# Altium PCB STRWL-P01-V01.PcbDoc
Units mil, origin at the board's own origin, x right, y up, seen from the top; angles counter-clockwise.
Board outline 6000 x 4000 mil, 2 copper layers (Top Layer, Bottom Layer); 109 components, 76 nets, 401 pads, 30 vias.
Unrouted connection lines stored in the file: 162.
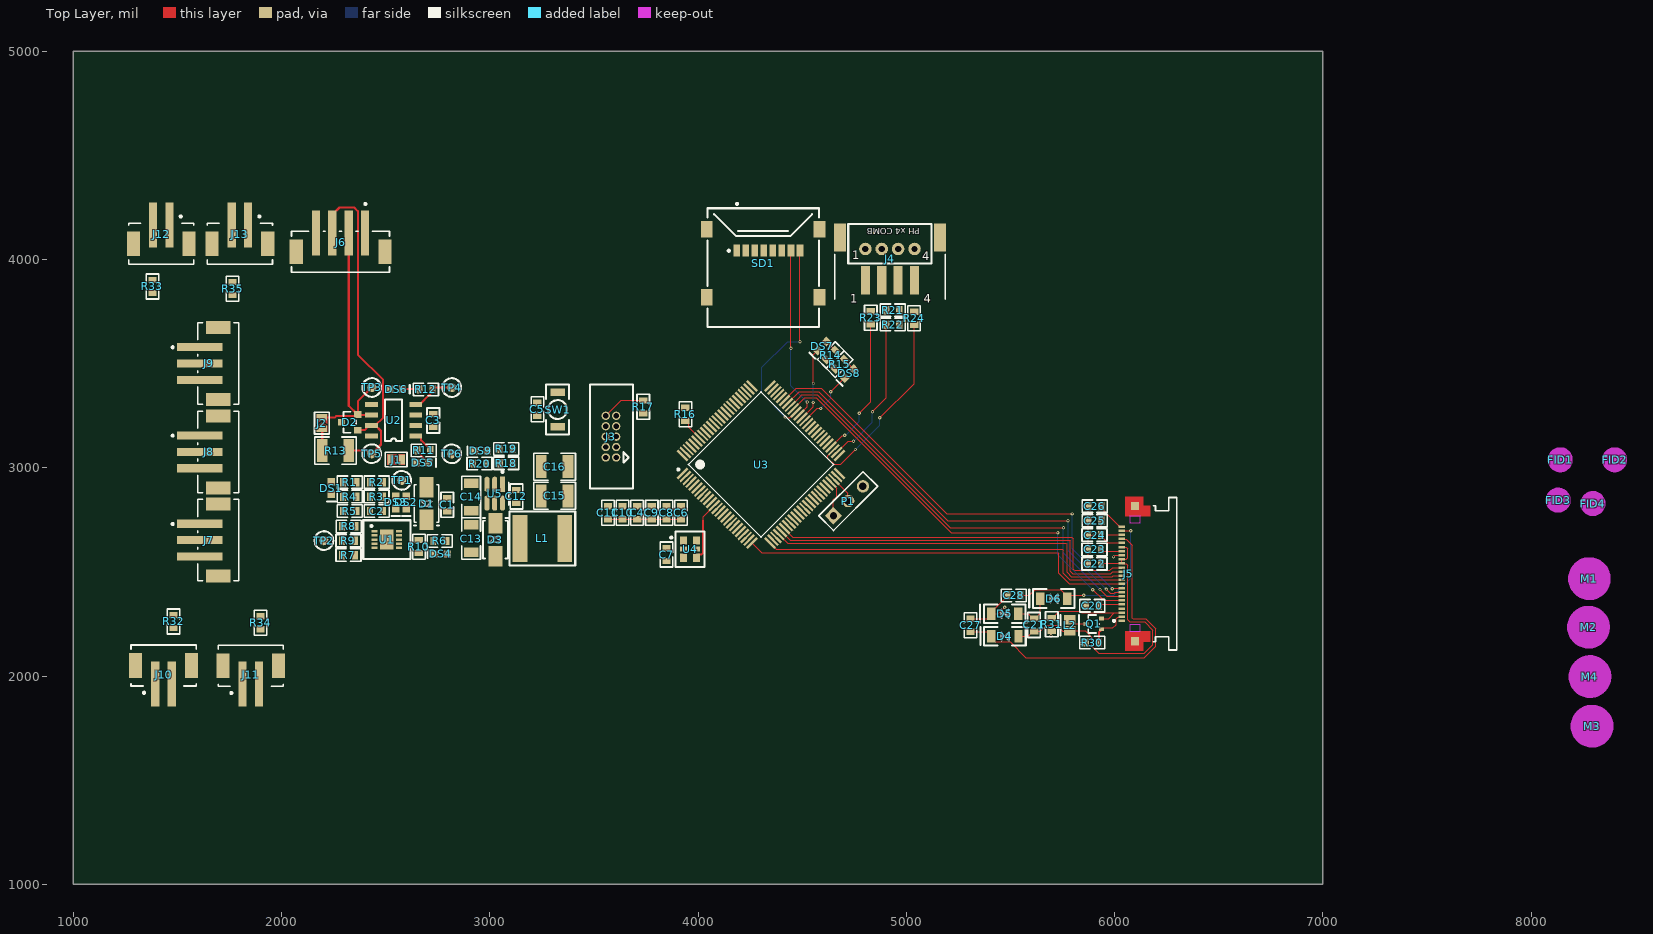
[diagram p0: Top Layer view]
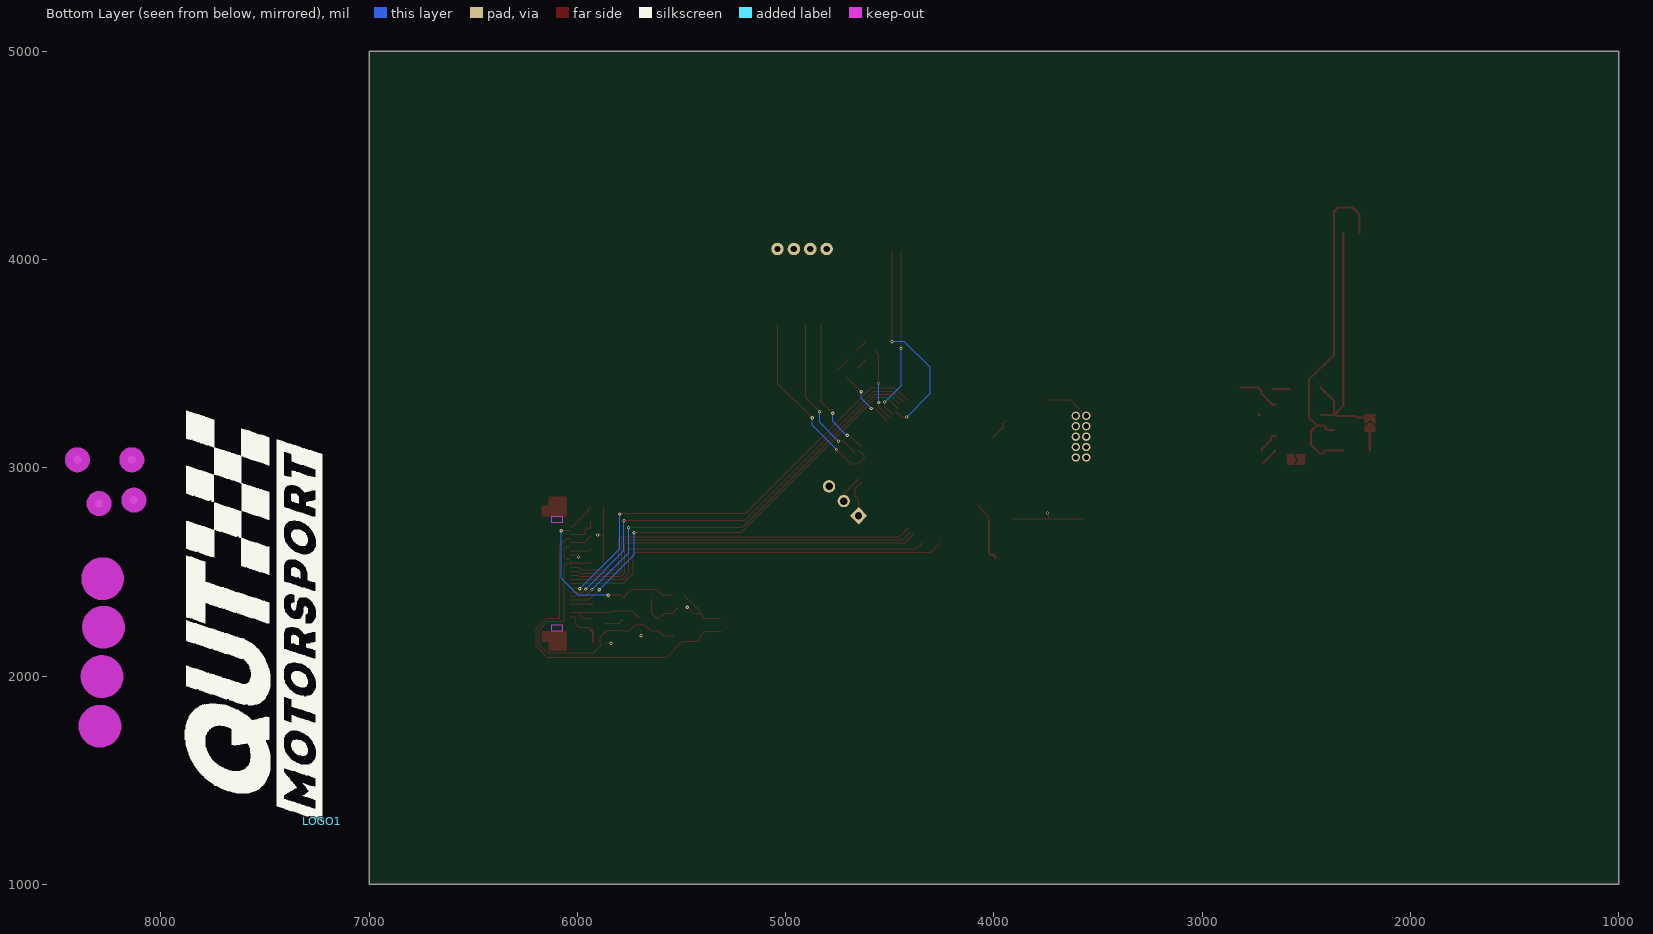
[diagram p1: Bottom Layer view, seen from below]

## Layer stack, top to bottom
Top Solder: solder mask 0.4, Solder Resist, Dk 3.5
Top Layer: signal copper 1.4
Dielectric 1: dielectric 12.6, FR-4, Dk 4.8
Bottom Layer: signal copper 1.4
Bottom Solder: solder mask 0.4, Solder Resist, Dk 3.5

## Board outline
1000,1000 7000,1000 7000,5000 1000,5000

## Design rules (kind name [scope] priority, off if disabled: settings)
Clearance [All] p1: gap=10 ignorepadtopadclearanceinfootprint=TRUE except(0: Arc-Hole Track-Hole SMDPad-Hole THPad-Hole Via-Hole Fill-Hole Poly-Hole Region-Hole Text-Hole)
PolygonConnect [All] p1: connectstyle=Relief reliefconductorwidth=10 reliefentries=4 polygonreliefangle="90 Angle" airgapwidth=10
RoutingVias [All] p1: holewidth=7.87 width=15.75 viastyle="Through Hole" minholewidth=7.87 minwidth=15.75 maxholewidth=7.87 maxwidth=15.75
SolderMaskExpansion [All] p1: expansion=4 istentingtop=FALSE
Width [All] p1: maxlimit=20 minlimit=5 preferedwidth=10
30 further rules are at their usual default settings.

## Classes and differential pairs
component class U_STRWL-S06-V00-Peripherals: J4 R21 R22 R23 R24 SD1
component class U_STRWL-S05-V00-Master-PSU3V3-300mA: C12 C13 C14 C15 C16 D3 DS9 L1 R18 R19 R20 U5
component class U_STRWL-S04-V00-Microcontroller: C4 C5 C6 C7 C8 C9 C10 C11 DS7 DS8 J3 P1 R14 R15 R16 R17 SW1 U3 U4
component class U_STRWL-S03-V00-CAN_MAIN: C3 D2 DS5 DS6 J1 J2 R11 R12 R13 TP3 TP4 TP5 TP6 U2
component class U_STRWL-S02-V00-12VProtection: C1 C2 D1 DS1 DS2 DS3 DS4 R1 R2 R3 R4 R5 R6 R7 R8 R9 R10 TP1 TP2 U1
component class STRWL-S01-V01-Master1: C20 C21 C22 C23 C24 C25 C26 C27 C28 D4 D5 D6 FID1 FID2 FID3 FID4 J5 J6 J7 J8 J9 J10 J11 J12 J13 L2 LOGO1 M1 M2 M3 M4 Q1 R30 R31 R32 R33 R34 R35

## Components (designator, comment, footprint, x,y, rotation, side; value= is the part's Value field where it differs from the comment)
C1 "4u7 50V 5%" Cap_Ceramic_0603 2795,2823 r270 top
C2 "470nF 50V 5%" Cap_Ceramic_0603 2456,2793 r180 top
C3 "100nF 50V 5% X7R 0603" Cap_Ceramic_0603 2728,3227.76 r270 top
C4 "100nF 50V 5% X7R 0603" Cap_Ceramic_0603 3707,2785.08 r90 top
C5 "100nF 50V 5% X7R 0603" Cap_Ceramic_0603 3228,3282 r90 top
C6 "100nF 50V 5% X7R 0603" Cap_Ceramic_0603 3918,2784.84 r90 top
C7 "100nF 50V 5% X7R 0603" Cap_Ceramic_0603 3848,2584 r90 top
C8 "100nF 50V 5% X7R 0603" Cap_Ceramic_0603 3848,2784.84 r90 top
C9 "100nF 50V 5% X7R 0603" Cap_Ceramic_0603 3777,2784.84 r90 top
C10 "100nF 50V 5% X7R 0603" Cap_Ceramic_0603 3637,2785.08 r90 top
C11 "4u7" Cap_Ceramic_0603 3567,2785.08 r90 top
C12 "100nF 50V 5% X7R 0603" Cap_Ceramic_0603 3127,2862.76 r270 top
C13 "22uF 35V" Cap_Ceramic_1206 2910,2660.76 r270 top
C14 "22uF 35V" Cap_Ceramic_1206 2910,2860.24 r90 top
C15 "47uF 16V 1210" Cap_Ceramic_1210 3311,2865.76 r180 top
C16 "47uF 16V 1210" Cap_Ceramic_1210 3311,3005.76 r180 top
C20 "1uF 25V 5% X7R 0603" Cap_Ceramic_0603 5892,2338 r0 top
C21 "4u7 50V 5% X7R 0603" Cap_Ceramic_0603 5613,2246 r270 top
C22 "1uF 25V 5% X7R 0603" Cap_Ceramic_0603 5903.26,2540 r0 top
C23 "1uF 25V 5% X7R 0603" Cap_Ceramic_0603 5903.31,2608.51 r0 top
C24 "1uF 25V 5% X7R 0603" Cap_Ceramic_0603 5903.31,2677.51 r0 top
C25 "1uF 25V 5% X7R 0603" Cap_Ceramic_0603 5903.69,2746.49 r0 top
C26 "1uF 25V 5% X7R 0603" Cap_Ceramic_0603 5904,2816 r0 top
C27 "1uF 25V 5% X7R 0603" Cap_Ceramic_0603 5308,2245 r270 top
C28 "1uF 25V 5% X7R 0603" Cap_Ceramic_0603 5515,2388 r0 top
D1 "1N4448WQ-7-F" SMA 2696,2829 r270 top
D2 "NUP2105L" NUP2105L 2327,3219 r90 top
D3 "B260A-13-F" SMA 3026,2655.24 r90 top
D4 "STPS0530Z" SOD123 5473,2192 r180 top
D5 "STPS0530Z" SOD123 5472,2300 r180 top
D6 "STPS0530Z" SOD123 5707.89,2372.5 r180 top
DS1 "LED Red 0603" "LED RED 0603" 2238,2903 r270 top
DS2 "LED Red 0603" "LED RED 0603" 2598,2834 r270 top
DS3 "LED Green 0603" "LED GREEN 0603" 2548,2834 r270 top
DS4 "LED Green 0603" "LED GREEN 0603" 2765,2586.76 r180 top
DS5 "LED Blue 0603" "LED BLUE 0603" 2676.76,3024.54 r0 top
DS6 "LED Blue 0603" "LED BLUE 0603" 2550.33,3378 r0 top
DS7 "LED Orange" "LED ORANGE 0603" 4594.92,3585 r225 top
DS8 "LED Orange" "LED ORANGE 0603" 4725.21,3453.21 r225 top
DS9 "LED Green 0603" "LED GREEN 0603" 2956.76,3082 r180 top
FID1 "Fiducial 1MM" "FIDUCIAL 1MM" 8139,3039 r0 top
FID2 "Fiducial 1MM" "FIDUCIAL 1MM" 8400,3039 r90 top
FID3 "Fiducial 1MM" "FIDUCIAL 1MM" 8129,2845 r90 top
FID4 "Fiducial 1MM" "FIDUCIAL 1MM" 8296,2828.78 r90 top
J1 "Jumper 2Way Solderable" Jumper_2Way_Solderable 2577.23,3040.14 r90 top
J2 "Jumper 2Way Solderable" Jumper_2Way_Solderable 2192.99,3187.93 r0 top
J3 "IDC 10P 2x5 1.27mm" "IDC 1.27MM 10P" 3581.26,3150.1 r90 top
J4 "JST PH 4x RIGHT COMB" "JST PH 4x RIGHT COMB" 4920.84,4166.06 r0 top
J5 "52437-2471" MOLX-52437-2471 6066,2492 r90 top
J6 "JST PH 4 Way VERT SMD" "JST 4P VERT SMD" 2281.91,4038.42 r180 top
J7 "JST PH 3 Way VERT SMD" "JST 3P VERT SMD" 1695.51,2653.27 r270 top
J8 "JST PH 3 Way VERT SMD" "JST 3P VERT SMD" 1695.51,3076.79 r270 top
J9 "JST PH 3 Way VERT SMD" "JST 3P VERT SMD" 1695.51,3501.27 r270 top
J10 "JSP PH 2 Way VERT SMD" "JST 2P VERT SMD" 1433,2002 r180 top
J11 "JSP PH 2 Way VERT SMD" "JST 2P VERT SMD" 1852,2001 r180 top
J12 "JSP PH 2 Way VERT SMD" "JST 2P VERT SMD" 1422,4126.02 r0 top
J13 "JSP PH 2 Way VERT SMD" "JST 2P VERT SMD" 1799.51,4126.02 r0 top
L1 "74404064221" Inductor_6x6mm 3250,2661.24 r0 top
L2 "LQM21FN100M70L" Murata_LQM21FN_70_IPC_C 5784,2244 r90 top
LOGO1 "50mm Wide QUTMS Logo" "QUTMS LOGO 50MM" 7224.16,1304 r90 bottom
M1 "Hole M3 Tight Unplated" "M3.2 UNPLATED" 8279,2468.1 r0 top
M2 "Hole M3 Tight Unplated" "M3.2 UNPLATED" 8275,2235.3 r0 top
M3 "Hole M3 Tight Unplated" "M3.2 UNPLATED" 8292,1760 r0 top
M4 "Hole M3 Tight Unplated" "M3.2 UNPLATED" 8282,1998 r0 top
P1 "Header 3" HDR1X3 4649.72,2770 r45 top
Q1 "MOSFET N-CH 30V 4A SOT323" Diodes_SOT323_0 5900,2250.61 r90 top
R1 "4k7 5% 0603" Res_ThinFilm_0603 2327,2931 r0 top
R2 "4k7 5% 0603" Res_ThinFilm_0603 2456,2931 r180 top
R3 "4k7 5% 0603" Res_ThinFilm_0603 2455.94,2862 r180 top
R4 "2M2 1%" Res_ThinFilm_0603 2327,2862 r0 top
R5 "2M2 1%" Res_ThinFilm_0603 2327,2793 r0 top
R6 "4k7 5% 0603" Res_ThinFilm_0603 2760,2649 r180 top
R7 "150k 5% 0603" Res_ThinFilm_0603 2321,2581 r0 top
R8 "390k 5%" Res_ThinFilm_0603 2322,2719 r0 top
R9 "240k 5%" Res_ThinFilm_0603 2321,2650 r0 top
R10 "1k 5% 0603" Res_ThinFilm_0603 2659,2622 r270 top
R11 "330R" Res_ThinFilm_0603 2682.24,3084 r180 top
R12 "330R" Res_ThinFilm_0603 2693.24,3376.81 r180 top
R13 "120R 1% 1210" Res_ThinFilm_1210 2259,3083 r180 top
R14 "330R" Res_ThinFilm_0603 4636.92,3542 r225 top
R15 "330R" Res_ThinFilm_0603 4680,3498 r225 top
R16 "10k 1% 0603" Res_ThinFilm_0603 3938.44,3257.15 r90 top
R17 "4k7" Res_ThinFilm_0603 3736,3292.87 r270 top
R18 "64k9 1%" Res_ThinFilm_0603 3078.24,3022 r0 top
R19 "1k" Res_ThinFilm_0603 3077.87,3091 r0 top
R20 "19k6 1%" Res_ThinFilm_0603 2950.24,3021 r0 top
R21 "10k 5% 0603" Res_ThinFilm_0603 4934.5,3757 r0 top
R22 "15k 5% 0603" Res_ThinFilm_0603 4934.5,3688 r180 top
R23 "22R" Res_ThinFilm_0603 4829,3720.76 r270 top
R24 "22R" Res_ThinFilm_0603 5037,3718.76 r270 top
R30 "10k 1% 0603" Res_ThinFilm_0603 5892.57,2161.22 r180 top
R31 "0R47 5% 0603" Res_ThinFilm_0603 5698,2248.61 r90 top
R32 "10k 5% 0603" Res_ThinFilm_0603 1481,2262.76 r270 top
R33 "10k 5% 0603" Res_ThinFilm_0603 1380,3871 r90 top
R34 "10k 5% 0603" Res_ThinFilm_0603 1899,2256 r90 top
R35 "10k 5% 0603" Res_ThinFilm_0603 1764.51,3860.76 r270 top
SD1 "47219-2001" 47219-2001 4312,3982.75 r0 top
SW1 "B3U-1000P" "BTN B3U-1000P" 3325.26,3280.1 r90 top
TP1 "TestPoint" TestPointSMD 2577,2940 r180 top
TP2 "TestPoint" TestPointSMD 2203,2651 r0 top
TP3 "TestPoint_SMD" TestPointSMD 2433,3386.07 r0 top
TP4 "TestPoint_SMD" TestPointSMD 2817,3385.83 r0 top
TP5 "TestPoint_SMD" TestPointSMD 2433,3068.14 r0 top
TP6 "TestPoint_SMD" TestPointSMD 2817,3067.67 r0 top
U1 "MAX17612A" MAX17612A 2505,2656 r0 top
U2 "SN65HVD233" SN65HVD233DR 2538,3229 r180 top
U3 "STM32F207VGT7" STM-LQFP100_N 4301.74,3016.1 r45 top
U4 "DSC1101CI5-020.0000T" VDFN6_3P2X2P5_MCH 3961,2610 r0 top
U5 "LMR14010ADDCR" Texas_Instruments_DDC0006A_IPC_A 3023.24,2876 r270 top

## Footprints (in the part's own frame and the unit in brackets; to place one, negate y for a bottom-side part, rotate by r counter-clockwise, add the part's x,y. Pads: shape width x height; smd on the part's side, far side on the other; paste and mask are expansions set on the pad)
47219-2001 [mm]
  rect 0.8x1.5 smd: 1(-3.205,1.55) 2(-2.105,1.55) 3(-1.005,1.55) 4(0.095,1.55) 5(1.195,1.55) 6(2.295,1.55) 7(3.395,1.55) 8(4.495,1.55)
  rect 1.45x2 smd: 9(6.875,4.15) 10(6.875,-4.15) 11(-6.875,-4.15) 12(-6.875,4.15)
  silkscreen extent -6.8,-7.8 6.8,7.36, body extent -7.3,-7.79 7.3,6.71, height 1.91
"BTN B3U-1000P" [mil] "OMRON B3U-1000P"
  rect 35x70 smd: 1(-82.68,0) 2(82.68,0)
  silkscreen extent -120,-55 120,55, body extent -79,-49 79,49, height 63
Cap_Ceramic_0603 [mil]
  rect 30x40 smd: 1(-31.24,0) 2(31.24,0)
  silkscreen extent -60,-30 60,30, body extent -31,-16 32,16, height 33
Cap_Ceramic_1206 [mil]
  rect 47x71 smd: 1(-66.08,0) 2(66.08,0)
  silkscreen extent -100,-45 100,45, body extent -63,-31 63,32, height 53
Cap_Ceramic_1210 [mm]
  rect 1.3x2.8 smd: 1(-1.625,0) 2(1.625,0)
  silkscreen extent -2.54,-1.65 2.54,1.65, body extent -1.6,-1.25 1.6,1.25, height 1.35
Diodes_SOT323_0 [mm]
  rect 0.47x0.6 smd paste+0 mask+0: 1(0,0.95) 2(-0.65,-0.95) 3(0.65,-0.95)
  silkscreen extent -1.1,-0.67 1.1,0.67, body extent -1.35,-1.2 1.35,1.2, height 0.25
"FIDUCIAL 1MM" [mm]
  round 1 smd mask+1: 1(0,0)
  round 1 smd far side mask+1: 1(0,0)
  Keep-Out Layer circle w1.524: c0,0 r0.762
HDR1X3 [mm] "Connector; Header; 3 Position"
  rect 1.5x1.5 hole 0.9: 1(0,0)
  round 1.5 hole 0.9: 2(2.54,0) 3(5.08,0)
  silkscreen extent -1.27,-1.27 6.35,1.27
"IDC 1.27MM 10P" [mil]
  round 40 hole 25: 1(-100,-25) 2(-100,25) 3(-50,-25) 4(-50,25) 5(0,-25) 6(0,25) 7(50,-25) 8(50,25) 9(100,-25) 10(100,25)
  silkscreen extent -250,-105 250,100, body extent -249,-104 249,100, height 214
Inductor_6x6mm [mm]
  rect 1.8x5.7 smd: 1(-2.667,0) 2(2.794,0)
  silkscreen extent -3.94,-3.3 4.06,3.3, body extent -3,-3 3,3, height 4.56
"JST 2P VERT SMD" [mm]
  rect 1x5.5 smd paste+0 mask+0: 1(1,1) 2(-1,1)
  rect 1.6x3 smd paste+0 mask+0: 3(3.4,-1.25) 4(-3.4,-1.25)
  silkscreen extent -3.98,-3.75 3.98,2.2, body extent -4.3,-3.85 4.3,3.85, height 0.25
"JST 3P VERT SMD" [mm]
  rect 1x5.5 smd paste+0 mask+0: 1(-2,-2.25) 2(0,-2.25) 3(2,-2.25)
  rect 1.6x3 smd paste+0 mask+0: 4(-4.4,0) 5(4.4,0)
  silkscreen extent -4.97,-5.67 4.97,2.5, body extent -5.3,-5.1 5.3,2.6, height 0.25
"JST 4P VERT SMD" [mm]
  rect 1x5.5 smd paste+0 mask+0: 1(-3.025,-2.25) 2(-1.025,-2.25) 3(0.975,-2.25) 4(2.975,-2.25)
  rect 1.6x3 smd paste+0 mask+0: 5(-5.425,0) 6(5.375,0)
  silkscreen extent -6,-5.95 5.95,2.5, body extent -6.32,-5.1 6.27,2.6, height 0.25
"JST PH 4x RIGHT COMB" [mm]
  rect 1.1x3.5 smd: 1(-3,-6.75) 2(-1,-6.75) 3(1,-6.75) 4(3,-6.75)
  round 1.524 hole 0.762: 1(-3,-2.921) 2(-1,-2.921) 3(1,-2.921) 4(3,-2.921)
  rect 1.5x3.4 smd: M(-6.1,-1.5) M(6.1,-1.5)
  silkscreen extent -6.73,-9.02 6.73,0.13, body extent -6.07,-8.2 6.07,0.06, height 5.89
Jumper_2Way_Solderable [mil]
  rect 50x30 smd: 1(0,55) 2(0,0)
  Top Layer region: -25,25 0,40 25,25 25,70 -25,70
  Top Layer region: -25,15 0,30 25,15 25,-15 0,-15 -25,-15
  silkscreen extent -35,-25 35,80
"LED BLUE 0603" [mil]
  rect 35x35 smd: 1(-30,0) 2(30,0)
  silkscreen extent 65,-20 65,20, body extent -40,-20 40,20, height 30
"LED GREEN 0603" [mil]
  rect 35x35 smd: 1(-30,0) 2(30,0)
  silkscreen extent 65,-20 65,20, body extent -40,-20 40,20, height 30
"LED ORANGE 0603" [mil]
  rect 35x35 smd: 1(-30,0) 2(30,0)
  silkscreen extent 65,-20 65,20, body extent -40,-20 40,20, height 30
"LED RED 0603" [mil]
  rect 35x35 smd: 1(-30,0) 2(30,0)
  silkscreen extent 65,-20 65,20, body extent -40,-20 40,20, height 30
"M3.2 UNPLATED" [mm]
  round 0 hole 3.2 unplated mask+2.6: 1(0,0)
  Keep-Out Layer circle w2.667: c0,0 r1.27
MAX17612A [mm]
  rect 0.75x0.3 smd: 1(-1.5,1) 2(-1.5,0.5) 3(-1.5,0) 4(-1.5,-0.5) 5(-1.5,-1) 6(1.5,-1) 7(1.5,-0.5) 8(1.5,0) 9(1.5,0.5) 10(1.5,1)
  rect 1.6x2.4 smd: 11(0,0)
  silkscreen extent -2.87,-2.4 2.87,2.35, body extent -1.55,-1.5 1.55,1.5, height 0.8
MOLX-52437-2471 [mm] "FPC Connector, 24-Leads, Right Angle, Pitch 0.5 mm, SMT"
  rect 0.3x0.8 smd: 1(-5.75,0.8) 2(-5.25,0.8) 3(-4.75,0.8) 4(-4.25,0.8) 5(-3.75,0.8) 6(-3.25,0.8) 7(-2.75,0.8) 8(-2.25,0.8) 9(-1.75,0.8) 10(-1.25,0.8) 11(-0.75,0.8) 12(-0.25,0.8) 13(0.25,0.8) 14(0.75,0.8) 15(1.25,0.8) 16(1.75,0.8) 17(2.25,0.8) 18(2.75,0.8) 19(3.25,0.8) 20(3.75,0.8) 21(4.25,0.8) 22(4.75,0.8) 23(5.25,0.8) 24(5.75,0.8)
  rect 1x1 smd: MP1(-8.25,-0.8) MP2(8.25,-0.8)
  Top Layer region: 7,0.4 9.4,0.4 9.4,-1.8 8.3,-1.8 8.3,-2.65 7,-2.65
  Top Layer region: -7,0.4 -9.4,0.4 -9.4,-1.8 -8.3,-1.8 -8.3,-2.65 -7,-2.65
  Keep-Out Layer region: 6.2,-1.45 7,-1.45 7,-0.15 6.2,-0.15
  Keep-Out Layer region: -6.2,-0.15 -7,-0.15 -7,-1.45 -6.2,-1.45
  silkscreen extent -9.3,-5.9 9.3,1.87, body extent -9.3,-5.9 9.3,0.9, height 2.05
Murata_LQM21FN_70_IPC_C [mil]
  rect 45.45x53.39 smd paste+0 mask+0: 1(-26.61,0) 2(26.61,0)
  silkscreen extent -49,-44 49,44, body extent -53,-32 53,32, height 10
NUP2105L [mm]
  rect 0.8x0.9 smd: 1(-0.95,-1) 2(0.95,-1) 3(0,1)
  silkscreen extent -1.27,-0.76 1.27,0.76, body extent -1.45,-1.22 1.45,1.18, height 1
"QUTMS LOGO 50MM" [mil]
  silkscreen extent 0,0 1970,660
Res_ThinFilm_0603 [mil]
  rect 30x40 smd: 1(-31.24,0) 2(31.24,0)
  silkscreen extent -60,-30 60,30, body extent -31,-16 32,16, height 18
Res_ThinFilm_1210 [mm]
  rect 1.3x2.8 smd: 1(-1.625,0) 2(1.625,0)
  silkscreen extent -2.54,-1.65 2.54,1.65, body extent -1.6,-1.25 1.6,1.25, height 0.6
SMA [mm]
  rect 2.5x1.7 smd: A(-2,0) K(2,0)
  silkscreen extent -2.3,-1.52 2.67,1.52, body extent -2.52,-1.46 2.52,1.46, height 2.4
SN65HVD233DR [mm]
  rect 1.55x0.6 smd: 1(-2.7,1.903) 2(-2.7,0.633) 3(-2.7,-0.637) 4(-2.7,-1.907) 5(2.7,-1.907) 6(2.7,-0.637) 7(2.7,0.633) 8(2.7,1.903)
  silkscreen extent -1.04,-2.54 1.04,2.54, body extent -3.01,-2.45 3.01,2.45, height 1.63
SOD123 [mil]
  rect 40x60 smd: A(-65,0) K(65,0)
  silkscreen extent -100,-45 118,45, body extent -74,-33 74,33, height 47
STM-LQFP100_N [mm] "Thin QFP, 100-Leads, Body 14x14mm, Pitch 0.5mm, IPC Medium Density"
  rect 1.8x0.3 smd: 1(-7.55,6) 2(-7.55,5.5) 3(-7.55,5) 4(-7.55,4.5) 5(-7.55,4) 6(-7.55,3.5) 7(-7.55,3) 8(-7.55,2.5) 9(-7.55,2) 10(-7.55,1.5) 11(-7.55,1) 12(-7.55,0.5) 13(-7.55,0) 14(-7.55,-0.5) 15(-7.55,-1) 16(-7.55,-1.5) 17(-7.55,-2) 18(-7.55,-2.5) 19(-7.55,-3) 20(-7.55,-3.5) 21(-7.55,-4) 22(-7.55,-4.5) 23(-7.55,-5) 24(-7.55,-5.5) 25(-7.55,-6) 51(7.55,-6) 52(7.55,-5.5) 53(7.55,-5) 54(7.55,-4.5) 55(7.55,-4) 56(7.55,-3.5) 57(7.55,-3) 58(7.55,-2.5) 59(7.55,-2) 60(7.55,-1.5) 61(7.55,-1) 62(7.55,-0.5) 63(7.55,0) 64(7.55,0.5) 65(7.55,1) 66(7.55,1.5) 67(7.55,2) 68(7.55,2.5) 69(7.55,3) 70(7.55,3.5) 71(7.55,4) 72(7.55,4.5) 73(7.55,5) 74(7.55,5.5) 75(7.55,6)
  rect 0.3x1.8 smd: 26(-6,-7.55) 27(-5.5,-7.55) 28(-5,-7.55) 29(-4.5,-7.55) 30(-4,-7.55) 31(-3.5,-7.55) 32(-3,-7.55) 33(-2.5,-7.55) 34(-2,-7.55) 35(-1.5,-7.55) 36(-1,-7.55) 37(-0.5,-7.55) 38(0,-7.55) 39(0.5,-7.55) 40(1,-7.55) 41(1.5,-7.55) 42(2,-7.55) 43(2.5,-7.55) 44(3,-7.55) 45(3.5,-7.55) 46(4,-7.55) 47(4.5,-7.55) 48(5,-7.55) 49(5.5,-7.55) 50(6,-7.55) 76(6,7.55) 77(5.5,7.55) 78(5,7.55) 79(4.5,7.55) 80(4,7.55) 81(3.5,7.55) 82(3,7.55) 83(2.5,7.55) 84(2,7.55) 85(1.5,7.55) 86(1,7.55) 87(0.5,7.55) 88(0,7.55) 89(-0.5,7.55) 90(-1,7.55) 91(-1.5,7.55) 92(-2,7.55) 93(-2.5,7.55) 94(-3,7.55) 95(-3.5,7.55) 96(-4,7.55) 97(-4.5,7.55) 98(-5,7.55) 99(-5.5,7.55) 100(-6,7.55)
  silkscreen extent -7.67,-6.25 6.25,6.82, body extent -7,-7 7,7, height 1.6
TestPointSMD [mil]
  round 45 smd: 1(0,0)
  silkscreen extent -45,-45 45,45
Texas_Instruments_DDC0006A_IPC_A [mm]
  rect 1.854x0.612 smd paste+0 mask+0: 1(-1.15,0.95)
  rrect100% 1.854x0.612 smd paste+0 mask+0: 2(-1.15,0) 3(-1.15,-0.95) 4(1.15,-0.95) 5(1.15,0) 6(1.15,0.95)
  silkscreen extent -2.8,-1.7 1.4,1.7, body extent -2.58,-1.95 2.58,1.95, height 0.25
VDFN6_3P2X2P5_MCH [mm]
  rect 0.85x1 smd paste-0.425 mask+0: 1(-0.8,1.05) 3(-0.8,-1.05) 4(0.8,-1.05) 6(0.8,1.05)
  rect 0.85x0.6 smd paste+0 mask+0: 2(-0.8,0) 5(0.8,0)
  silkscreen extent -2.41,-2.16 1.78,2.16, body extent -1.25,-1.6 1.25,1.6, height 0.65

## Part data
C1 C11: library part "4u7 50V 5% X7R 0603", "Capacitor, Ceramic, SMD, 4u7, 50V, 5%, X7R, 0603"
C2: library part "470nF 50V 5% X7R 0603", "Capacitor, Ceramic, SMD, 470nF, 50V, 5%, X7R, 0603"
C3 C4 C5 C6 C7 C8 C9 C10 C12: "Capacitor, Ceramic, SMD, 100nF, 50V, 5%, X7R, 0603"
C13 C14: library part "22uF 35V 20% X5R 1206", "22µF ±20% 35V Ceramic Capacitor X5R 1206 (3216 Metric)", ComponentLink1Description=Digikey, ComponentLink1URL=https://www.digikey.com.au/product-detail/en/tdk-corporation/C3216X5R1V226M160AC/445-8045-1-ND/2792165, ComponentLink2Description=Datasheet, ComponentLink2URL=https://product.tdk.com/info/en/catalog/datasheets/mlcc_commercial_general_en.pdf
C15 C16: library part "47uF 16V 10% X7R 1210", "Capacitor, Ceramic, SMD, 47uF, 16V, 5%, X7R, 1210"
C20 C22 C23 C24 C25 C26 C27 C28: "Capacitor, Ceramic, SMD, 1uF, 25V, 5%, X7R, 0603"
C21: "Capacitor, Ceramic, SMD, 4u7, 50V, 5%, X7R, 0603"
D1: "Diode, SMD, 75V, 5%, 250mA, SOD123", Average Rectified Current=150mA, Forward Voltage=1V, Manufacturer="ON Semiconductor / Fairchild", Manufacturer Part Number=1N914BWS, Max Forward Surge Current (Ifsm)=4A, Max Operating Temperature=150°C, Max Repetitive Reverse Voltage (Vrrm)=75V, Max Reverse Leakage Current=5uA, Min Operating Temperature=-55°C, Package Quantity=1, Power Dissipation=200mW, Category="Rectifier Diodes", Contact Plating=Tin,Matte, Element Configuration=Single, Forward Current=150mA, Height=1mm, Lead Free="Lead Free", Length=1.8mm, Max Reverse Voltage (DC)=75V, Mount="Surface Mount", Number of Pins=2, Packaging="Tape and Reel", Peak Reverse Current=5uA, Radiation Hardening=No, REACH SVHC="No SVHC", Recovery Time=4ns, Reverse Recovery Time=4ns, Reverse Voltage=75V, Weight=0.0276g, Width=1.35mm
D3: "Diode, Schottky Barrier Rectifier, 60 V, 2 A, B260A-13-F"
D4 D5 D6: "Diode, Schottky Barrier Rectifier, 30 V, 0.5 A, STPS0530Z"
DS5 DS6: library part "LED BLUE 0603"
DS7 DS8: library part "LED ORANGE 0603"
J1 J2: library part "Jumper 2Way Side Solderable", "Jumper 2Way Side Solderable"
J5: "0.5 mm Pitch Easy-On(TM) Type FPC Connector, Right Angle, ZIF, SMT, Bottom Contact, 24 Circuits, -40 to 85 degC, ELV and RoHS Compliant, Tape and Reel", Current (Max per Contact)=0.5A, Manufacturer=Molex, Voltage (Max)=50V, Circuits (Loaded)=24, ComponentLink1Description="Manufacturer URL", ComponentLink1URL=http://www.molex.com/molex/index.jsp, ComponentLink2Description=Datasheet, ComponentLink2URL=http://www.molex.com/webdocs/datasheets/pdf/en-us/0524372471_FFC_FPC_CONNECTORS.pdf, ComponentLink3Description="Package Specification", ComponentLink3URL=http://www.molex.com/pdm_docs/sd/524372471_sd.pdf, Contact Position=Bottom, Durability (mating cycles max)=20, Entry Angle="90degrees Angle", Material - Metal="Phosphor Bronze", Material - Plating Mating=Gold, Material - Plating Termination=Gold, Mounting Technology="Surface Mount", Number of Rows=1, Orientation="Right Angle", PackageDescription="24-Lead FPC Connector, Pitch 0.5 mm", PackageReference=52437-2471, PackageVersion="Rev. E, 07/2013", Packing="Tape and Reel", PartNumber=52437-2471, PCB Locator=No, PCB Retention=None, Pitch - Mating Interface=0.50mm, Polarized to PCB=Yes, RoHS=TRUE, Stackable=No
J10 J11 J12 J13: color=White, current_rating="2 A", Digikey Part Number=455-1734-1-ND, flammability_rating="UL 94 V-0", housing_color=Natural, insulation_resistance="1 GO", Manufacturer=JST, Package=CONN_SMT_7MM95_5MM0, Temperature="-25°C to +85°C", Temperature Range High=+85°C, Temperature Range Low=-25°C, voltage_rating_ac="100 V", Category 75Fab8F04590Ae3D="Connectors and Adapters", Category 0836C53C3D42D3F1=Connectors, Category A3C16Ecb93907806=Uncategorized, Category Bda670Ac885E6661=Uncategorized, Category Dab617Bcef8C0171="PC Board", Category E42C2926D3763Feb="Wire to Board", Category E7012A0Bd22E3Cc6="Headers & Receptacles", Category Fcf631Fcc9332731=Uncategorized, ComponentLink1Description=Upverter, ComponentLink1URL=https://upverter.com/upn/revision/aa2260f5f3c02952/, ComponentLink2Description=Datasheet, ComponentLink2URL=https://upverter.com/datasheet/05f4473ffc638d76a3bb68900fd4324175be47ba.pdf, contact_material=Brass, contact_plating=Tin, Digikey Description="CONN 2 Positions Header, Shrouded Connector 0.079\" (2.00mm) Surface Mount Tin", gender=Female, helpURL=https://upverter.com/upn/revision/aa2260f5f3c02952/, housing_material=Nylon, Lead Free=yes, Mounting Type="surface mount", number_of_contacts=2, number_of_positions=2, number_of_rows=1, Num Pins=2, pin_pitch="2 mm", Price=0.401172514632, RoHS=TRUE, size_height="6.6 mm", size_length="7.95 mm", size_width="5 mm", Supplier 1=Digi-Key, Supplier 2=Mouser, Supplier Part Number 1=455-1734-1-ND
L1: "FIXED IND 220UH 660MA 850 MOHM", ComponentLink1Description=Digikey, ComponentLink1URL=https://www.digikey.com.au/product-detail/en/w%C3%BCrth-elektronik/74404064221/732-7261-1-ND/5353241, ComponentLink2Description="LCSC A", ComponentLink2URL=https://lcsc.com/product-detail/Power-Inductors_Sunlord-SWPA6045S221MT_C91047.html, ComponentLink3Description="LCSC B", ComponentLink3URL=https://lcsc.com/product-detail/Power-Inductors_SXN-Shun-Xiang-Nuo-Elec-SMNR6045-221MT_C467145.html
LOGO1: library part "QUTMS Logo 50mm"
M1 M2 M3 M4: "M3.2 Hole, No Plating"
P1: "Header, 3-Pin", LatestRevisionDate=17-Jul-2002, LatestRevisionNote="Re-released for DXP Platform.", Publisher="Altium Limited"
Q1: library part DMN3065LW-13, "N-Channel 30V 4A (Ta) 770mW (Ta) Surface Mount SOT-323"
R1 R2 R3 R6: "Resistor, SMD, 4k7, 0.1W, 5%, 0603"
R4 R5: library part "2M2 1% 0603", "Resistor, SMD, 2M2, 0.125W, 1%, 0603"
R7: library part "150k 5%, 0603", "Resistor, SMD, 150k, 0.1W, 5%, 0603"
R8: library part "390k 5% 0603", "Resistor, SMD, 390k, 0.1W, 5%, 0603"
R9: library part "240k 5% 0603", "Resistor, SMD, 240k, 0.1W, 5%, 0603"
R10: "Resistor, SMD, 1k, 0.1W, 5%, 0603"
R11 R12 R14 R15: library part "330R 5% 0603", "Resistor, SMD, 330R, 0.1W, 5%, 0603"
R13: "Resistor, SMD, 120R, 0.25W, 1%, 1210"
R16: library part "20k 1% 0603", "Resistor, SMD, 20k, 0.1W, 5%, 0603"
R17: library part "4k7 5% 0603", "Resistor, SMD, 4k7, 0.1W, 5%, 0603"
R18: library part "64k9 1% 0603", "Resistor, SMD, 64k9, 0.1W, 5%, 0603"
R19: library part "1k 5% 0603", "Resistor, SMD, 1k, 0.1W, 5%, 0603"
R20: library part "19k6 1% 0603", "Resistor, SMD, 19k6, 0.1W, 5%, 0603"
R21 R32 R33 R34 R35: "Resistor, SMD, 10k, 0.1W, 5%, 0603"
R22: "Resistor, SMD, 15k, 0.1W, 5%, 0603"
R23 R24: library part "22R 1% 0603", "Resistor, SMD, 22R, 0.1W, 1%, 0603"
R30: "Resistor, SMD, 10k, 0.1W, 1%, 0603"
R31: library part "0R47 5% 0603_1", "Resistor, SMD, 0R, 0.1W, 5%, 0603"
SD1: "MicroSD Card Connector, Hinge Type, -40 to 85 degC, 8-Pin SMD, RoHS, Tape and Reel"
SW1: library part "BTN B3U-1000P", "Omron B3U-1000P Ultra Miniture Switch", ComponentLink1Description=LCSC, ComponentLink1URL=https://lcsc.com/product-detail/Tactile-Switches_BRIGHT-TSA063G50-250_C294565.html
U1: "4.5V to 60V, 250mA Current-Limiter with OV, UV, and Reverse Protection", ComponentLink1Description=Datasheet, ComponentLink1URL=https://datasheets.maximintegrated.com/en/ds/MAX17612A-MAX17612C.pdf
U3: library part STM32F207VGT7-Custom, "ARM Cortex-M3 32-bit MCU, 1024 KB Flash, 128 KB Internal RAM, 82 I/Os, 100-pin LQFP, -40 to 105 degC, Tray", I/Os (High Current)=82, Operating Frequency(F) (Processor speed) (MHz)=120, Supply Voltage(Vcc) min (V)=1.8, ComponentLink1Description="Manufacturer URL", ComponentLink1URL=http://www.st.com/web/en/home.html, ComponentLink2Description=Datasheet, ComponentLink2URL=http://www.st.com/st-web-ui/static/active/en/resource/technical/document/datasheet/CD00237391.pdf, ComponentLink3Description="Package Specification", ComponentLink3URL=http://www.st.com/st-web-ui/static/active/en/resource/technical/document/data_brief/DM00071938.pdf, Core="ARM Cortex-M3", D/A Converter="2x12-bit (2 Channel)", DatasheetVersion="Rev. 9", FLASH Size (Prog) (kB)=1024, Internal RAM Size (kB)=128, Mounting Technology="Surface Mount", PackageDescription="100-Pin Low Profile Quad Flat Package, 14 x 14 mm Body, 0.5 mm Pitch", PackageReference=LQFP100, PackageVersion="Rev. 1, 06/2013", Packing=Tray, PartNumber=STM32F207VGT7
U4: "No Description Available", Built_By=EMA_Jessica, Copyright="Copyright (C) 2018 Accelerated Designs. All rights reserved", Manufacturer_Part_Number=DSC1101CI5-020.0000T, RefDes=RefDes, SourceLibrary=Microchip_2019-08-23_23, Type=DEV, Vendor=Microchip
D2: ComponentLink1Description=Datasheet, ComponentLink1URL=https://www.onsemi.cn/PowerSolutions/document/NUP2105L-D.PDF, ComponentLink2Description=LCSC, ComponentLink2URL=https://lcsc.com/product-detail/TVS_ON-Semiconductor-NUP2105LT1G_C14486.html, ComponentLink3Description=Digikey, ComponentLink3URL=https://www.digikey.com.au/product-detail/en/on-semiconductor/SZNUP2105LT1G/SZNUP2105LT1GOSCT-ND/3487669
U2: ComponentLink1Description=LCSC, ComponentLink1URL=https://lcsc.com/product-detail/CAN-ICs_Texas-Instruments_SN65HVD233DRG4_Texas-Instruments-Texas-Instruments-SN65HVD233DRG4_C61643.html, ComponentLink2Description=Digikey, ComponentLink2URL=https://www.digikey.com.au/product-detail/en/texas-instruments/SN65HVD233DR/296-35967-1-ND/4134960, ComponentLink3Description=Datasheet, ComponentLink3URL=https://www.ti.com/lit/ds/symlink/sn65hvd233.pdf?ts=1588560888178, ComponentLink4Description="Ti Product Page", ComponentLink4URL=https://www.ti.com/product/SN65HVD233

## Via types
v1: diameter 15.75, hole 7.87, Top Layer to Bottom Layer, 30 vias

## Nets (pads, with @x,y where several pads share a name; then routed paths per layer and width w, separated by ;. In a path a pad name is that pad's centre, name@x,y a point inside that pad or via, vN(x,y) a via of type N, cw(c..) or ccw(c..) an arc to the next point about the centre after c; other vN are vias at no path point)
3V3: C3.1 C4.2 C6.2 C7.2 C8.2 C9.2 C10.2 C11.2 C15.2 C16.2 C21.2 C22.2 D4.A J1.1 J3.1 J5.15 J5.16 J5.19 J7.3 J8.3 J9.3 L1.2 L2.1 R14.2 R15.2 R17.2 R18.2 R19.2 R32.1 R33.1 R34.2 R35.2 SD1.4 U2.3 U3.6 U3.11 U3.19 U3.22 U3.28 U3.50 U3.75 U3.100 U4.1 U4.6 | length 1569.1
  Top Layer w5: R14.2 4614.83,3518.99 R15.2 ; D4.A 5585.24,2192 5608,2214.76 C21.2 5642.71,2214.76 5672.82,2244.88 5723.18,2244.88 5736.49,2231.56 5736.49,2228.08 5749.8,2214.76 5781.38,2214.76 L2.1 5857.85,2217.39 5888.84,2186.4 5888.84,2143.52 5922.94,2109.41 6142.04,2109.41 6182.83,2150.2 6182.83,2221.58 6144.01,2260.4 6072.96,2260.4 6062.75,2270.61 6062.75,2532.6 6055.43,2539.92 6035.78,2539.92 J5.15 ; C22.2 5935.7,2541.2 J5.15 ; J5.19 6035.78,2618.66 6055.43,2618.66 6062.75,2611.34 6062.75,2569.49 6055.43,2562.17 6035.78,2562.17 J5.16 J5.15
  Top Layer w10: C3.1@2723.07,3254.07 C3.1
12V: C2.2 J6.4 R1.2 R2.2 R3.2 R4.2 R5.2 U1.1
12VP: C1.2 C13.1 C14.1 D1.K R6.2 TP1.1 U1.10 U5.4 U5.5
B1: J10.2 R32.2 U3.84
B2: J12.2 R33.2 U3.85
B3: J11.2 R34.1 U3.86
B4: J13.2 R35.1 U3.87
BOOT: R16.1 U3.94 | length 114.9
  Top Layer w5: R16.1 3943.44,3225.92 3955.94,3213.42 3955.94,3194.87 U3.94
"BUS SEL": J5.8 U3.69 | length 2116.9
  Top Layer w5: U3.69 4485.16,3366.56 4578.94,3366.56 5199.13,2746.37 v1(5775.95,2746.37) ; v1(5960,2418) 5979.28,2398.72 5998.11,2398.72 6002.8,2403.41 J5.8
  Bottom Layer w5: v1(5775.95,2746.37) 5776.25,2745.74 5776.25,2601.75 v1(5960,2418)
"BUS STATE": J5.9 U3.70 | length 2144.1
  Top Layer w5: U3.70 4414.48,3325.53 4470.51,3381.56 4590.21,3381.56 5192.83,2778.94 v1(5796.26,2778.94) ; v1(5988,2419.1) 5988,2419 5990.91,2419 5995,2423.09 J5.9
  Bottom Layer w5: v1(5796.26,2778.94) 5796.26,2749.95 5796.32,2749.89 5796.32,2610.68 5987.95,2419.05 v1(5988,2419.1)
"CAN GLV RX": R12.1 TP4.1 U2.4 U3.95 | length 213.2
  Top Layer w10: U2.4 2662.98,3304.07 2714.47,3355.56 2714.47,3366.81 R12.1 2733.49,3385.83 TP4.1
"CAN GLX TX": R11.1 TP6.1 U2.1 U3.96 | length 109.7
  Top Layer w10: U2.1 2662.98,3154.07 2669.79,3147.26 2669.79,3132.68 2713.47,3089 R11.1
"CAN MAIN H": D2.1 J6.3 R13.1 TP5.1 U2.7 | length 1706.5
  Top Layer w10: J6.3 2243.52,4215.58 2278.2,4250.27 2348.16,4250.27 2366.31,4232.11 2366.31,3543.4 2487.18,3422.53 2487.18,3240.87 U2.7@2450.38,3204.07 ; R13.1 2408.67,3083 2423.53,3068.14 TP5.1 2477.2,3112.33 2477.2,3177.26 U2.7@2450.38,3204.07 ; D2.1 2399.09,3181.6 2406.17,3188.68 2406.17,3197.26 2412.98,3204.07 U2.7 U2.7@2450.38,3204.07
"CAN MAIN L": D2.2 J2.1 J6.2 TP3.1 U2.6 | length 1290.6
  Top Layer w10: J2.1 2256.88,3242.93 2263.7,3249.75 2357.75,3249.75 D2.2@2364.4,3256.4 ; J6.2 2322.26,3298.54 D2.2@2364.4,3256.4 ; U2.6 2368.7,3254.07 D2.2 ; TP3.1 2366.37,3319.44 D2.2 ; D2.2@2364.4,3256.4 D2.2
"CAN MAIN LED": DS5.1 DS6.1 J1.2 | length 7.4
  Top Layer w10: J1.2 J1.2@2582.46,3045.37
"CAN MAIN RX LED": DS6.2 R12.2 | length 82.2
  Top Layer w10: DS6.2 2660.81,3378 R12.2
"CAN MAIN TX LED": DS5.2 R11.2 | length 83.3
  Top Layer w10: R11.2 2651,3079 2692.96,3037.04 2694.26,3037.04 DS5.2
"CHIP SEL": J5.12 U3.29 | length 1813.9
  Top Layer w5: U3.29 4429.29,2638 5768,2638 5771,2635 5771,2499 5771.8,2498.2 5771.8,2497.8 5792.13,2477.46 5987.89,2477.46 5992.57,2482.15 J5.12
CLMODE: R7.2 U1.4
DATA/CMD: J5.11 U3.26 | length 1828.3
  Top Layer w5: U3.26 4375.27,2608.51 5750.16,2608.51 5753.09,2605.58 5753.09,2493.51 5784.13,2462.46 J5.11
FLAG: DS2.2 U1.6
GND: C1.1 C2.1 C3.2 C4.1 C5.1 C6.1 C7.1 C8.1 C9.1 C10.1 C11.1 C13.2 C14.2 C15.1 C16.1 C20.1 C22.1 C23.1 C24.1 C25.1 C26.1 C27.1 C28.1 D1.A D2.3 D3.A D5.K DS3.2 DS4.2 DS9.2 J3.3 J3.5 J3.9 J4.4 J5.17 J6.1 J7.1 J8.1 J9.1 J10.1 J11.1 J12.1 J13.1 P1.3 R7.1 R8.1 R9.1 R10.1 R16.2 R20.1 R22.1 R30.2 R31.1 SD1.6 SD1.9 SD1.10 SD1.11 SD1.12 SW1.1 TP2.1 U1.9 U1.11 U2.2 U3.10 U3.13 U3.20 U3.21 U3.27 U3.74 U4.3 U5.2 | length 1094.7
  Top Layer w5: C11.1 C10.1 C4.1 3736,2753.84 ; v1(3742.24,2783.13) 3736,2776.89 3736,2753.84 ; C6.1 3917.76,2753.84 3848,2753.84 3777,2753.84 3736,2753.84 ; C27.1 5389.5,2276.24 5407,2293.74 D5.K ; v1(5472,2331) 5441,2300 D5.K ; C28.1 5483.76,2383 5428.26,2327.5 5424.5,2327.5 5407,2310 D5.K ; v1(5694,2194) 5694,2213.38 R31.1 ; v1(5838,2158) 5858.12,2158 R30.2 ; C22.1 5872.03,2608.45 C23.1 C24.1 ; C26.1 5872.76,2746.81 C25.1 5872.08,2746.12 C24.1 ; v1(5901.68,2677.51) C24.1 ; v1(5994.05,2572.66) 6001.97,2580.57 J5.17
NetC20_2: C20.2 J5.5 | length 113.9
  Top Layer w5: C20.2 5929.59,2344.35 J5.5
NetC21_1: C21.1 D5.A D6.K | length 232.9
  Top Layer w5: D5.A@5518,2329 5537,2310 D5.A 5585.24,2300 5608,2277.24 C21.1 5618,2277.24 5642.89,2302.13 D6.K
NetC23_2: C23.2 J5.18 | length 103.4
  Top Layer w5: C23.2 5942.8,2600.26 J5.18
NetC24_2: C24.2 J5.20 | length 118.6
  Top Layer w5: C24.2 5934.55,2672.51 5967.43,2639.63 J5.20
NetC25_2: C25.2 J5.22 | length 159.4
  Top Layer w5: C25.2 5934.92,2712.93 5937.85,2710.01 5954.73,2710.01 5962.05,2702.68 5962.05,2681.93 5964.98,2679 J5.22
NetC26_2: C26.2 J5.24 | length 144.5
  Top Layer w5: C26.2 5947.74,2803.5 5947.74,2795.29 6024.66,2718.37 J5.24
NetC27_2: C27.2 D4.K J5.21 | length 1603.5
  Top Layer w5: C27.2 5390.5,2213.76 5408,2196.26 D4.K 5408,2182 5425.5,2164.5 5497.82,2164.5 5573.32,2089 6142.85,2089 6197.83,2143.99 6197.83,2227.79 6150.22,2275.4 6088.1,2275.4 6085.17,2278.33 6085.17,2628.29 6055.43,2658.03 6035.78,2658.03 J5.21
NetC28_2: C28.2 D6.A J5.23 | length 880.5
  Top Layer w5: C28.2@5544,2385.76 C28.2 5590.72,2388 5617.72,2415 5740.39,2415 5772.89,2382.5 D6.A 5789.39,2389 v1(5851,2389) ; J5.23 6034.72,2698.46 6077.24,2698.46 v1(6077.46,2698.24)
  Bottom Layer w5: v1(5851,2389) 5996,2389 6077.46,2470.46 v1(6077.46,2698.24)
NetDS1_1: DS1.1 R1.1
NetDS2_1: DS2.1 R2.1
NetDS3_1: DS3.1 R3.1
NetDS4_1: DS4.1 R6.1
NetDS7_1: DS7.1 R14.1 | length 60.3
  Top Layer w5: DS7.1 4658.26,3564.09 R14.1
NetDS8_1: DS8.1 R15.1 | length 64
  Top Layer w5: R15.1 4702.09,3518.77 DS8.1
NetDS9_1: DS9.1 R19.1
NetJ2_2: J2.2 R13.2 | length 105.8
  Top Layer w10: J2.2 2195.01,3185.92 R13.2
NetJ5_2: J5.2 Q1.2 R30.1 | length 210.2
  Top Layer w5: Q1.2 5944.15,2231.77 5990.77,2231.77 6006.26,2247.26 6006.26,2261.2 6006.26,2276.7 6013.58,2284.02 6033.22,2284.02 J5.2
  Top Layer w10: R30.1 5923.81,2211.43 5930.59,2218.21 5930.59,2220.77 5934.84,2225.02 Q1.2
NetJ5_3: J5.3 Q1.3 R31.2 | length 425.3
  Top Layer w5: R31.2 5703,2279.85 5733.99,2310.84 5835.25,2310.84 5841.1,2304.98 5999.01,2304.98 ; Q1.3 5970.23,2276.2 5999.01,2304.98 ; J5.3 5999.01,2304.98
NetL2_2: L2.2 Q1.1 | length 86.9
  Top Layer w5: L2.2 5801.99,2252.61 5829.74,2252.61 5831.74,2250.61 Q1.1
NRST: C5.2 J3.10 R17.1 SW1.2 U3.14 | length 210.4
  Top Layer w5: J3.10 3630.26,3324.1 R17.1
"ORANGE LED 1": DS7.2 U3.64 | length 354.9
  Top Layer w5: U3.64 4552.01,3294.21 v1(4552.01,3314.45) ; v1(4553.68,3405) 4553.68,3543.76 DS7.2
  Bottom Layer w5: v1(4552.01,3314.45) 4553.68,3316.12 v1(4553.68,3405)
"ORANGE LED 2": DS8.2 U3.63 | length 295.6
  Top Layer w5: U3.63 4571.26,3285.63 v1(4588.63,3285.63) ; v1(4637.19,3365.48) 4637.48,3365.48 DS8.2
  Bottom Layer w5: v1(4588.63,3285.63) 4637.19,3334.19 v1(4637.19,3365.48)
"OSC IN": U3.12 U4.4 | length 293
  Top Layer w5: 4024.23,2747.97 4024.23,2766.43 U3.12
  Top Layer w10: U4.4 3992.5,2571.46 4004.23,2583.19 4015.44,2583.19 4024.23,2591.98 4024.23,2747.97
OVLO: R5.1 R9.2 U1.3
POT-L: J9.2 U3.15
POT-M: J8.2 U3.16
POT-R: J7.2 U3.17
"PWR CB 3V3": C12.1 U5.1
"PWR FB 3V3": R18.1 R20.2 U5.3
"PWR SW 3V3": C12.2 D3.K L1.1 U5.6
RESET: J5.10 U3.25 | length 1912.6
  Top Layer w5: U3.25 4305.47,2592 5728.07,2592 5731,2589.07 5731,2494.38 5782.61,2442.78 J5.10
SD_CMD: SD1.3 U3.83
SD_D0: SD1.7 U3.65 | length 838.6
  Top Layer w5: v1(4445.66,3574) SD1.7 ; U3.65 4524,3294.04 v1(4524,3316.19)
  Bottom Layer w5: v1(4445.66,3574) 4445.66,3394.53 v1(4524,3316.19)
SD_D1: SD1.8 U3.66 | length 1022.9
  Top Layer w5: v1(4418.77,3244.05) 4421.68,3244.05 4425.49,3240.23 4440.54,3240.23 4468.35,3268.04 U3.66 ; v1(4488.97,3606) SD1.8
  Bottom Layer w5: v1(4418.77,3244.05) 4305,3357.82 4305,3482.14 4429.07,3606.21 4488.76,3606.21 v1(4488.97,3606)
SD_D2: SD1.1 U3.78
SD_D3: SD1.2 U3.79
SDIO_CK: SD1.5 U3.80
"SERIAL CLK": J5.13 U3.30 | length 1806.6
  Top Layer w5: U3.30 4442.13,2653 5783.07,2653 5786,2650.07 5786,2504.81 5798.34,2492.46 5981.68,2492.46 5991.05,2501.83 J5.13
"SERIAL DATA": J5.14 U3.31 | length 1794.5
  Top Layer w5: U3.31 4454.97,2668 5792.81,2668 5801.49,2659.31 5801.49,2513.46 5807.49,2507.46 5975.46,2507.46 5989.52,2521.52 J5.14
SETI: R10.2 U1.8
SWCLK: J3.4 U3.76
SWDIO: J3.2 U3.72
"TEMP CLK": J5.6 U3.67 | length 2065.8
  Top Layer w5: U3.67 4510.84,3336.56 4566.51,3336.56 5214.7,2688.37 v1(5727.39,2688.37) ; v1(5895.25,2414.8) 5939.55,2370.5 5943.41,2370.5 5949.88,2364.04 J5.6
  Bottom Layer w5: v1(5727.39,2688.37) 5727.39,2582.46 5895.05,2414.8 v1(5895.25,2414.8)
"TEMP DATA": J5.7 U3.68 | length 2073.9
  Top Layer w5: U3.68@4451.86,3305.42 4481.8,3335.37 4498,3351.56 4572.73,3351.56 5211.29,2713 v1(5754,2713) ; v1(5929.65,2415.75) 5961.68,2383.72 J5.7
  Bottom Layer w5: v1(5754,2713) 5754,2591.4 v1(5929.65,2415.75)
USART3_RX: P1.2 U3.48 | length 133.1
  Top Layer w5: U3.48 4718.49,2877.74 4718.49,2842.65 P1.2
USART3_TX: P1.1 U3.47 | length 179
  Top Layer w5: U3.47 4637.19,2929.38 4665.01,2901.57 4665.01,2862.54 4649.72,2847.26 P1.1
"USB M": J4.3 R24.1
"USB P": J4.2 R23.1
USB_D6: R21.1 R22.2 U3.52 | length 729.4
  Top Layer w5: U3.52 4720.2,3128.34 v1(4745.92,3128.34) ; v1(4837,3270) 4903.26,3336.26 R22.2
  Bottom Layer w5: v1(4745.92,3128.34) 4747.34,3128.34 4837,3218 v1(4837,3270)
USB_DM: R24.2 U3.53 | length 941
  Top Layer w5: U3.53 4651.11,3085.28 4623.3,3057.47 4623.3,3047.12 4652.9,3017.52 4684.52,3017.52 v1(4755,3088) ; v1(4872.21,3240.21) 5037,3405 R24.2
  Bottom Layer w5: v1(4755,3088) 4872.21,3205.21 v1(4872.21,3240.21)
USB_DP: R23.2 U3.54 | length 676.6
  Top Layer w5: U3.54 4690.82,3154.63 4701.94,3154.63 v1(4704,3156.69) ; v1(4774,3262) 4829,3317 R23.2
  Bottom Layer w5: v1(4704,3156.69) 4706.91,3156.69 4715.22,3165 4716,3165 4774,3223 v1(4774,3262)
UVLO: R4.1 R8.2 U1.2
UVOV: DS1.2 U1.7
VUSB: J4.1 R21.2
pads on no net: FID1.1 FID2.1 FID3.1 FID4.1 J3.6 J3.7 J3.8 J4.M J5.1 J5.4 J5.MP1 J5.MP2 J6.5 J6.6 J7.4 J7.5 J8.4 J8.5 J9.4 J9.5 J10.3 J10.4 J11.3 J11.4 J12.3 J12.4 J13.3 J13.4 M1.1 M2.1 M3.1 M4.1 U1.5 U2.5 U2.8 U3.1 U3.2 U3.3 U3.4 U3.5 U3.7 U3.8 U3.9 U3.18 U3.23 U3.24 U3.32 U3.33 U3.34 U3.35 U3.36 U3.37 U3.38 U3.39 U3.40 U3.41 U3.42 U3.43 U3.44 U3.45 U3.46 U3.49 U3.51 U3.55 U3.56 U3.57 U3.58 U3.59 U3.60 U3.61 U3.62 U3.71 U3.73 U3.77 U3.81 U3.82 U3.88 U3.89 U3.90 U3.91 U3.92 U3.93 U3.97 U3.98 U3.99 U4.2 U4.5

## Text inside footprints (layer, text, board x,y; h text height)
J4: Top Overlay "4" at 5082.6,3792.56 h40; Top Overlay "1" at 4730.45,3792.96 h40; Top Overlay "PH x4 COMB" at 5063.51,4150.06 h29.53 r180; Top Overlay "4" at 5075.84,3996.06 h40; Top Overlay "1" at 4740.84,4001.06 h40